# Altium PCB layout.PcbDoc (part 1 of 11)
Units mil, origin at the board's own origin, x right, y up, seen from the top; angles counter-clockwise.
Board outline 3543.31 x 3149.61 mil, 2 copper layers (Top Layer, Bottom Layer); 78 components, 73 nets, 327 pads, 143 vias.
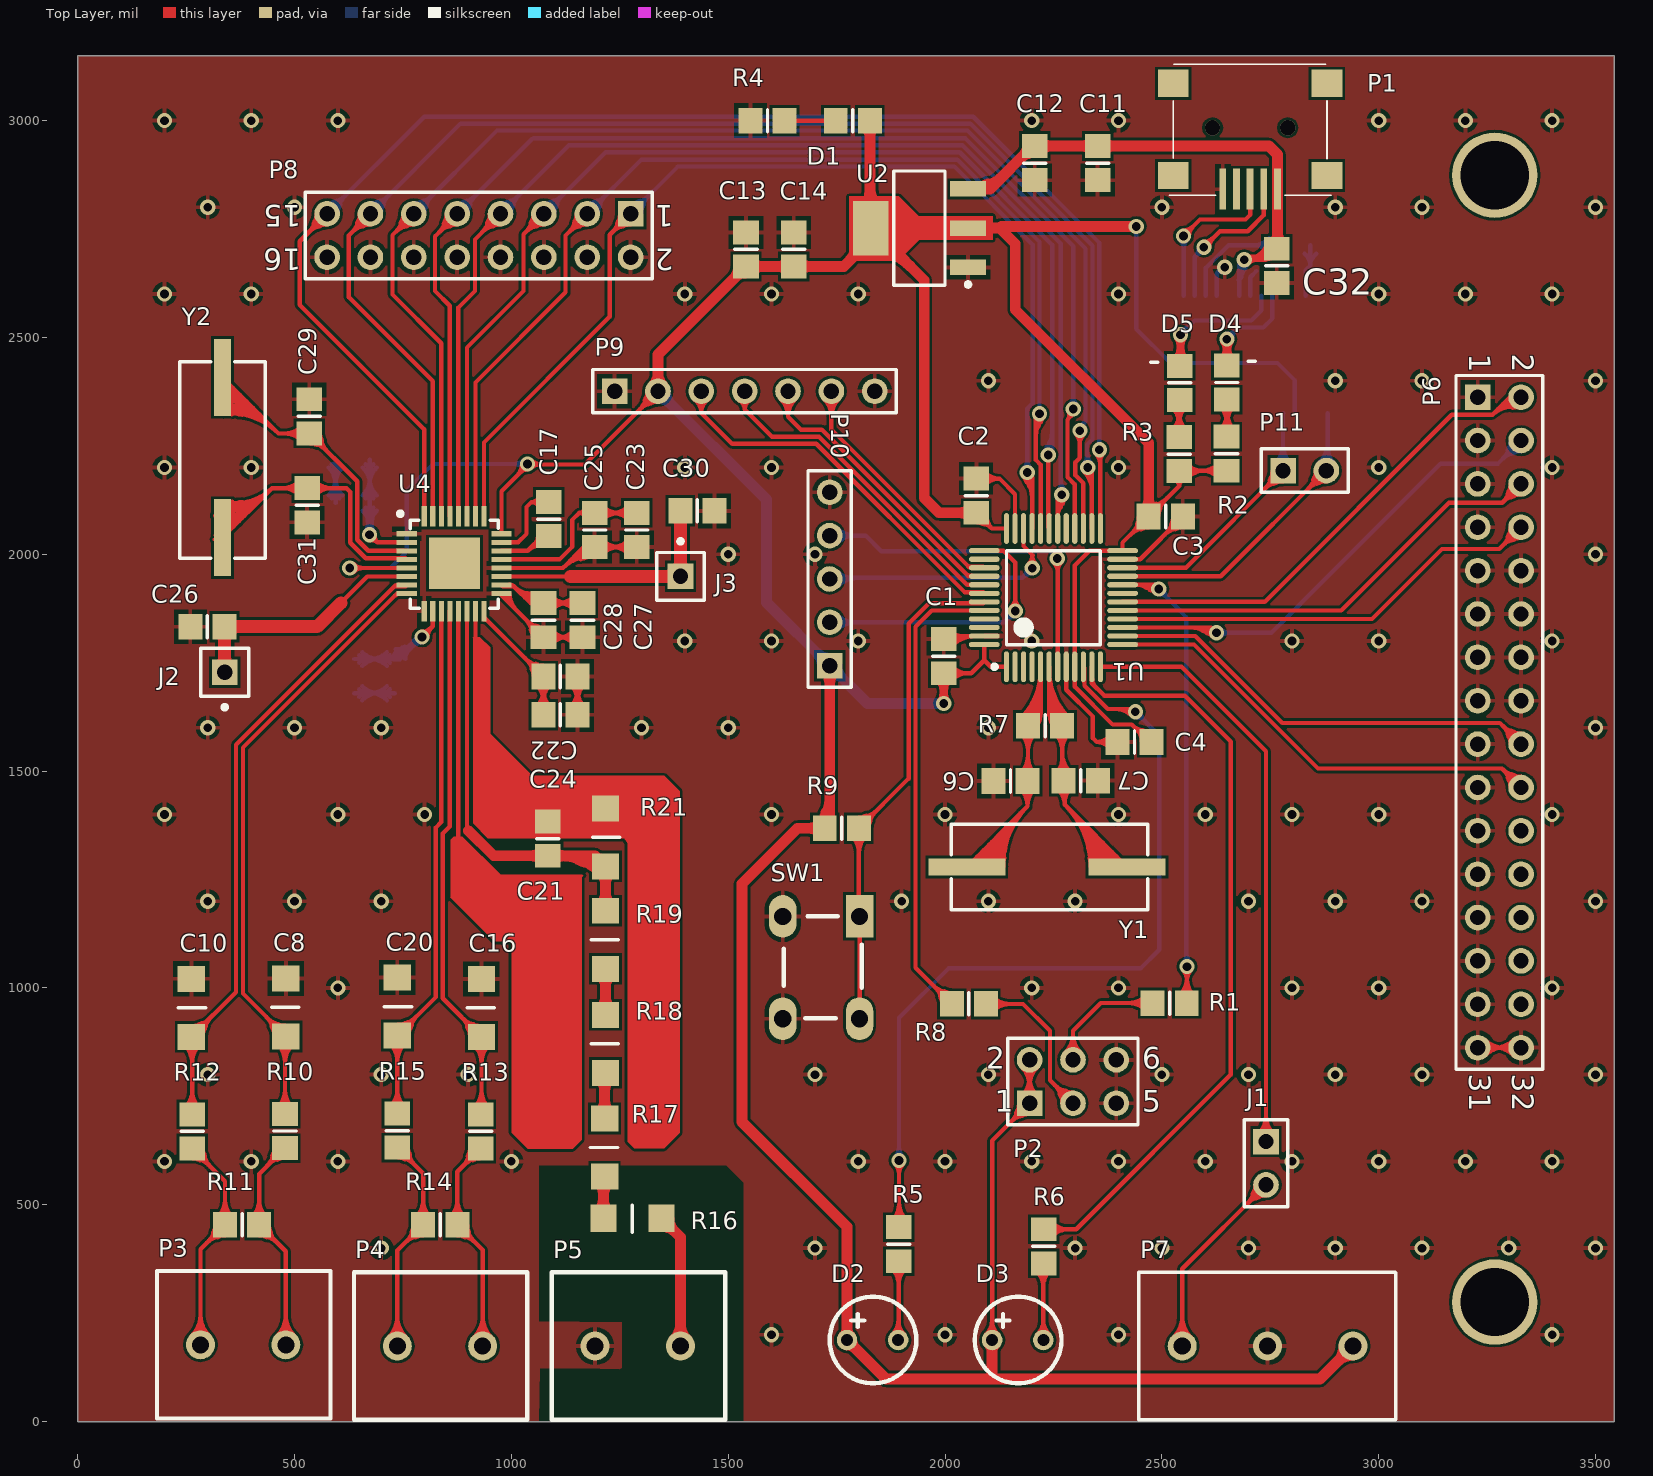
[diagram p0: Top Layer view]
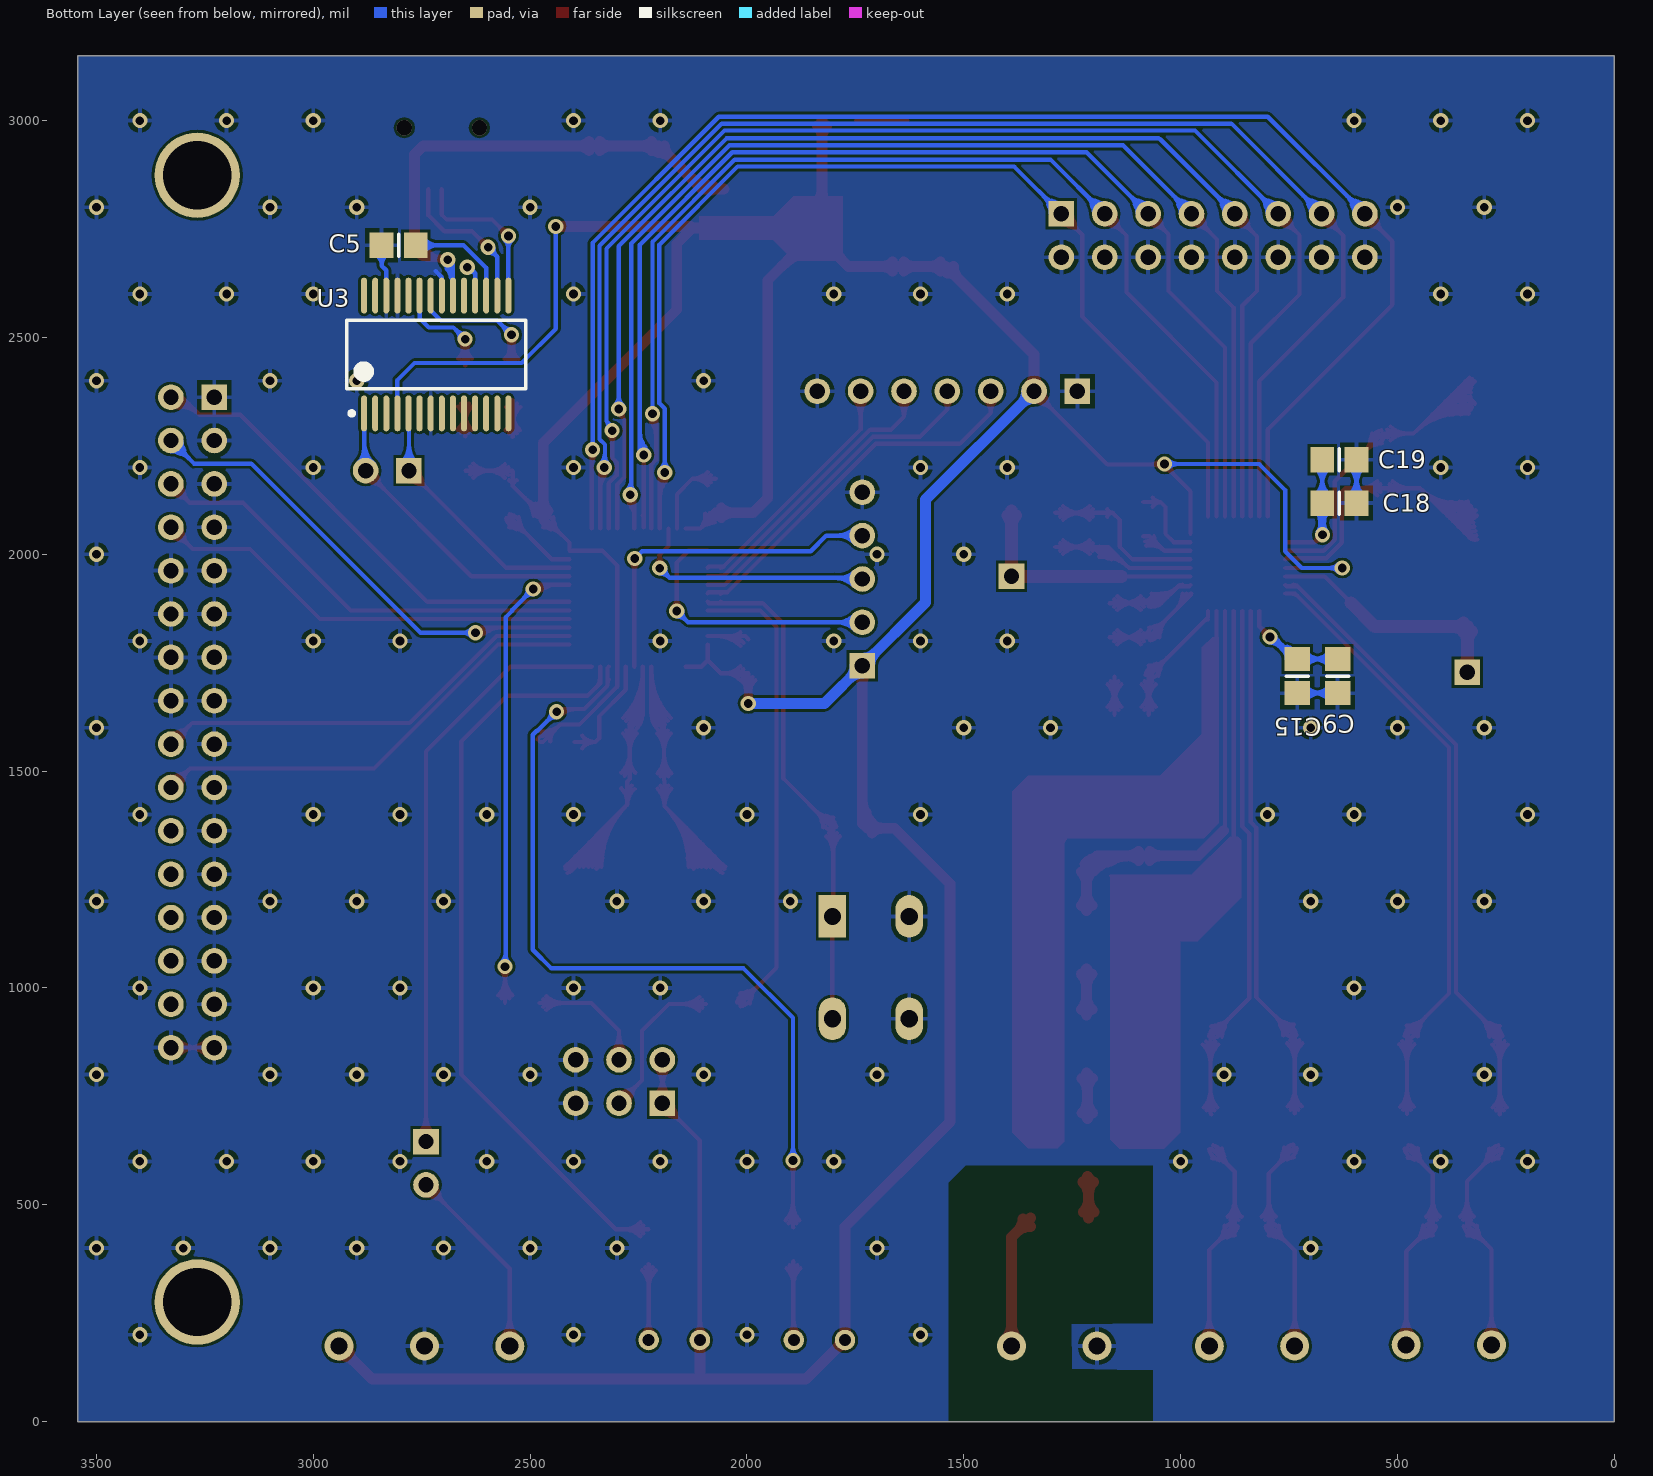
[diagram p1: Bottom Layer view, seen from below]

## Layer stack, top to bottom
Top Layer: signal copper 1.4
Dielectric: dielectric 12.6, FR-4, Dk 4.8
Bottom Layer: signal copper 1.4

## Board outline
0,0 0,3149.61 3543.31,3149.61 3543.31,0

## Design rules (kind name [scope] priority, off if disabled: settings)
Clearance [All] p1: gap=6
MinimumSolderMaskSliver [All] p1: minsoldermaskwidth=1
PolygonConnect [All] p1: connectstyle=Relief reliefconductorwidth=10 reliefentries=4 polygonreliefangle="90 Angle" airgapwidth=10
RoutingVias [All] p1: holewidth=20 width=35 viastyle="Through Hole" minholewidth=12 minwidth=20 maxholewidth=28 maxwidth=50
SilkToSilkClearance [All] p1: silktosilkclearance=0
SilkToSolderMaskClearance [IsPad] p1: minsilkscreentomaskgap=1 clearancetoexposedcopper=TRUE
SolderMaskExpansion [All] p1: expansion=4
Width [All] p1: maxlimit=50 minlimit=10 preferedwidth=10
25 further rules are at their usual default settings.

## Components (designator, comment, footprint, x,y, rotation, side; value= is the part's Value field where it differs from the comment)
C1 "Cap" 6-0805_M 1997,1765 r270 top
C2 "Cap" 6-0805_M 2072,2135 r270 top
C3 "Cap" 6-0805_M 2509,2087 r180 top
C4 "Cap" 6-0805_M 2437,1567 r0 top
C5 "Cap" 6-0805_M 2803.15,2712.6 r0 bottom
C6 "Cap" 6-0805_M 2151,1477 r180 top
C7 "Cap" 6-0805_M 2313,1478 r0 top
C8 "Cap" 1206_ROY 480,888 r90 top
C9 "Cap" 6-0805_M 638,1719 r270 bottom
C10 "Cap" 1206_ROY 262,1021 r270 top
C11 "Cap" 6-0805_M 2352,2902 r90 top
C12 "Cap" 6-0805_M 2207,2902 r90 top
C13 "Cap" 6-0805_M 1541.04,2702.89 r270 top
C14 "Cap" 6-0805_M 1651.28,2702.89 r270 top
C15 "Cap" 6-0805_M 731,1719 r270 bottom
C16 "Cap" 1206_ROY 931,887 r90 top
C17 "Cap" 6-0805_M 1086,2081 r270 top
C18 "Cap" 6-0805_M 634,2118 r180 bottom
C19 "Cap" 6-0805_M 634,2218 r180 bottom
C20 "Cap" 1206_ROY 737,1024 r270 top
C21 "Cap" 6-0805_M 1113,1630 r0 top
C22 "Cap" 6-0805_M 1113,1718 r0 top
C23 "Cap" 6-0805_M 1289,2056 r270 top
C24 "Cap" 6-0805_M 1084,1344 r90 top
C25 "Cap" 6-0805_M 1192,2056 r270 top
C26 "Cap" 6-0805_M 299,1833 r180 top
C27 "Cap" 6-0805_M 1164,1848 r270 top
C28 "Cap" 6-0805_M 1074,1848 r270 top
C29 "Cap" 6-0805_M 534,2318 r90 top
C30 "Cap" 6-0805_M 1429,2100 r0 top
C31 "Cap" 6-0805_M 529,2113 r270 top
C32 "Cap" 6-0805_M 2765,2665 r90 top
D1 "LED_TX" 6-0805_M 1787.4,3000 r180 top
D2 "LED_DIP" LED_3mm 1773.95,187.98 r0 top
D3 "LED_DIP" LED_3mm 2108.59,187.98 r0 top
D4 "LED_TX" 6-0805_M 2650,2396 r90 top
D5 "LED_RX" 6-0805_M 2541,2395 r90 top
J1 "Relay Jumper" HDR1X2 2740.16,645.67 r270 top
J2 "Socket" PIN1 339,1728 r180 top
J3 "Socket" PIN1 1390,1949 r0 top
P1 "USB" mini_USB 2527.56,3129.92 r270 top
P2 "BOOT" HDR2X3 2195,734 r0 top
P3 "IA" KF127-0.5-2 283,177 r0 top
P4 "IB" KF127-0.5-2 737,174 r0 top
P5 "VA" KF127-0.5-2 1193,174 r0 top
P6 "Header 16X2" HDR2X16 3228.35,2362.2 r270 top
P7 "Relay" KF127-0.5-3 2547,174 r0 top
P8 "9153Header" HDR2X8 1275,2785 r180 top
P9 "OLED" HDR1X7 1238,2376 r0 top
P10 "SWD" HDR1X5 1734,1743 r90 top
P11 "UART" HDR1X2 2779.53,2192.91 r0 top
R1 "Res3" 6-0805_M 2518,965 r180 top
R2 "Res3" 6-0805_M 2649,2232 r270 top
R3 "Res3" 6-0805_M 2540,2231 r270 top
R4 "Res3" 6-0805_M 1590.55,3000 r0 top
R5 "Res3" 6-0805_M 1893,409 r270 top
R6 "Res3" 6-0805_M 2228,404 r270 top
R7 "Res3" 6-0805_M 2230.68,1604.44 r180 top
R8 "Res3" 6-0805_M 2055,963 r180 top
R9 "Res3" 6-0805_M 1762,1368 r180 top
R10 "Res3" 6-0805_M 478,670 r90 top
R11 "Res3" 6-0805_M 379,454 r180 top
R12 "Res3" 6-0805_M 264,669 r90 top
R13 "Res3" 6-0805_M 929,669 r90 top
R14 "Res3" 6-0805_M 836,454 r180 top
R15 "Res3" 6-0805_M 737,671 r90 top
R16 "Res3" 1206_ROY 1346,469 r180 top
R17 "Res3" 1206_ROY 1215,565 r90 top
R18 "Res3" 1206_ROY 1217,804 r90 top
R19 "Res3" 1206_ROY 1217,1044 r90 top
R21 "Res3" 1206_ROY 1217,1414 r270 top
SW1 "SW_4Pin" SW_4 1803,1165 r270 top
U1 "STM32F103C8T6" LQFP48_N 2250,1900 r90 top
U2 "LM1117" SOT223-4L 1940.94,2751.97 r180 top
U3 "FT232RL-Reel" SSOP-28_N 2716.54,2460.63 r90 bottom
U4 "9153" LFCSP_32 758.72,2047.21 r0 top
Y1 "XTAL" XTAL_SMT 2235,1279 r180 top
Y2 "XTAL" XTAL_SMT 334,2223 r90 top

## Footprints (in the part's own frame and the unit in brackets; to place one, negate y for a bottom-side part, rotate by r counter-clockwise, add the part's x,y. Pads: shape width x height; smd on the part's side, far side on the other; paste and mask are expansions set on the pad)
6-0805_M [mm] "Chip Resistor, Body 2.0x1.2mm, IPC Low Density"
  rect 1.4x1.5 smd: 1(-1,0) 2(1,0)
  silkscreen extent 0,-0.65 0,0.65, body extent -1.07,-0.7 1.07,0.7, height 0.7
1206_ROY [mm]
  rect 1.52x1.6 smd: 1(0,0) 2(3.4,0)
  silkscreen extent 1.7,-0.76 1.7,0.84
HDR1X2 [mm] "Connector; Header; 2 Position"
  rect 1.5x1.5 hole 0.9: 1(0,0)
  round 1.5 hole 0.9: 2(2.54,0)
  silkscreen extent -1.27,-1.27 3.81,1.27
HDR1X5 [mm] "Connector; Header; 5 Position"
  rect 1.5x1.5 hole 0.9: 1(0,0)
  round 1.5 hole 0.9: 2(2.54,0) 3(5.08,0) 4(7.62,0) 5(10.16,0)
  silkscreen extent -1.27,-1.27 11.43,1.27
HDR1X7 [mm] "Connector; Header; 7 Position"
  rect 1.5x1.5 hole 0.9: 1(0,0)
  round 1.5 hole 0.9: 2(2.54,0) 3(5.08,0) 4(7.62,0) 5(10.16,0) 6(12.7,0) 7(15.24,0)
  silkscreen extent -1.27,-1.27 16.51,1.27
HDR2X3 [mm] "Connector; Header; 3x2 Position"
  rect 1.5x1.5 hole 0.9: 1(0,0)
  round 1.5 hole 0.9: 2(0,2.54) 3(2.54,0) 4(2.54,2.54) 5(5.08,0) 6(5.08,2.54)
  silkscreen extent -1.27,-1.27 6.35,3.81
HDR2X8 [mm] "Connector; Header; 8x2 Position"
  rect 1.5x1.5 hole 0.9: 1(0,0)
  round 1.5 hole 0.9: 2(0,2.54) 3(2.54,0) 4(2.54,2.54) 5(5.08,0) 6(5.08,2.54) 7(7.62,0) 8(7.62,2.54) 9(10.16,0) 10(10.16,2.54) 11(12.7,0) 12(12.7,2.54) 13(15.24,0) 14(15.24,2.54) 15(17.78,0) 16(17.78,2.54)
  silkscreen extent -1.27,-1.27 19.05,3.81
HDR2X16 [mm] "Connector; Header; 16x2 Position"
  rect 1.5x1.5 hole 0.9: 1(0,0)
  round 1.5 hole 0.9: 2(0,2.54) 3(2.54,0) 4(2.54,2.54) 5(5.08,0) 6(5.08,2.54) 7(7.62,0) 8(7.62,2.54) 9(10.16,0) 10(10.16,2.54) 11(12.7,0) 12(12.7,2.54) 13(15.24,0) 14(15.24,2.54) 15(17.78,0) 16(17.78,2.54) 17(20.32,0) 18(20.32,2.54) 19(22.86,0) 20(22.86,2.54) 21(25.4,0) 22(25.4,2.54) 23(27.94,0) 24(27.94,2.54) 25(30.48,0) 26(30.48,2.54) 27(33.02,0) 28(33.02,2.54) 29(35.56,0) 30(35.56,2.54) 31(38.1,0) 32(38.1,2.54)
  silkscreen extent -1.27,-1.27 39.37,3.81
KF127-0.5-2 [mm]
  round 1.7 hole 1: 1(0,0) 2(5,0)
  silkscreen extent -2.54,-4.32 7.62,4.32
KF127-0.5-3 [mm]
  round 1.7 hole 1: 1(0,0) 2(5,0) 3(10,0)
  silkscreen extent -2.54,-4.32 12.5,4.32
LED_3mm [mm]
  round 1.2 hole 0.7: 1(0,0) 2(3,0)
  silkscreen extent -1.02,-2.54 4.06,2.54
LFCSP_32 [mm]
  rect 1.2x0.3 smd: 1(0,0) 2(0,-0.5) 3(0,-1) 4(0,-1.5) 5(0,-2) 6(0,-2.5) 7(0,-3) 8(0,-3.5) 17(5.55,-3.5) 18(5.55,-3) 19(5.55,-2.5) 20(5.55,-2) 21(5.55,-1.5) 22(5.55,-1) 23(5.55,-0.5) 24(5.55,0)
  rect 0.3x1.2 smd: 9(1.025,-4.525) 10(1.525,-4.525) 11(2.025,-4.525) 12(2.525,-4.525) 13(3.025,-4.525) 14(3.525,-4.525) 15(4.025,-4.525) 16(4.525,-4.525) 25(4.525,1.025) 26(4.025,1.025) 27(3.525,1.025) 28(3.025,1.025) 29(2.525,1.025) 30(2.025,1.025) 31(1.525,1.025) 32(1.025,1.025)
  rect 3x3 smd: 33(2.8,-1.725)
  silkscreen extent -0.5,-4.35 5.35,1.3
LQFP48_N [mm] "Thin QFP, 48-Leads, Body 7x7mm, Pitch 0.5mm, IPC Medium Density"
  oval 1.8x0.3 smd: 1(-4.05,2.75) 2(-4.05,2.25) 3(-4.05,1.75) 4(-4.05,1.25) 5(-4.05,0.75) 6(-4.05,0.25) 7(-4.05,-0.25) 8(-4.05,-0.75) 9(-4.05,-1.25) 10(-4.05,-1.75) 11(-4.05,-2.25) 12(-4.05,-2.75) 25(4.05,-2.75) 26(4.05,-2.25) 27(4.05,-1.75) 28(4.05,-1.25) 29(4.05,-0.75) 30(4.05,-0.25) 31(4.05,0.25) 32(4.05,0.75) 33(4.05,1.25) 34(4.05,1.75) 35(4.05,2.25) 36(4.05,2.75)
  oval 0.3x1.8 smd: 13(-2.75,-4.05) 14(-2.25,-4.05) 15(-1.75,-4.05) 16(-1.25,-4.05) 17(-0.75,-4.05) 18(-0.25,-4.05) 19(0.25,-4.05) 20(0.75,-4.05) 21(1.25,-4.05) 22(1.75,-4.05) 23(2.25,-4.05) 24(2.75,-4.05) 37(2.75,4.05) 38(2.25,4.05) 39(1.75,4.05) 40(1.25,4.05) 41(0.75,4.05) 42(0.25,4.05) 43(-0.25,4.05) 44(-0.75,4.05) 45(-1.25,4.05) 46(-1.75,4.05) 47(-2.25,4.05) 48(-2.75,4.05)
  silkscreen extent -4.17,-2.75 2.75,3.57, body extent -3.5,-3.5 3.5,3.5, height 1.6
mini_USB [mm]
  rect 2.4x0.4 smd: 1(7.316,6.07) 2(7.316,5.27) 3(7.316,4.47) 4(7.316,3.67) 5(7.316,2.87)
  rect 1.6x1.8 smd: 6(6.516,-0.03) 7(6.516,8.97) 8(1.116,8.97) 9(1.116,-0.03)
  silkscreen extent 0,-0.26 7.67,9.2
PIN1 [mm] "Connector; Plug"
  rect 1.5x1.5 hole 0.9: 1(0,0)
  silkscreen extent -1.4,-1.4 1.4,2.17
SOT223-4L [mm] "SOT223, 4-Leads, Body 6.5x3.5mm, Pitch 2.3mm, Lead Span 7mm, IPC High Density"
  rect 2.1x0.9 smd: 1(-2.85,2.3) 2(-2.85,0) 3(-2.85,-2.3)
  rect 2.1x3.2 smd: 4(2.85,0)
  silkscreen extent -2.98,-3.35 1.5,3.42, body extent -1.85,-3.35 1.85,3.35, height 1.8
SSOP-28_N [mm] "SOP, 28-Leads, Body 10.2x5.3mm, Pitch 0.65mm, IPC Medium Density"
  oval 2.1x0.35 smd: 1(-3.45,4.225) 2(-3.45,3.575) 3(-3.45,2.925) 4(-3.45,2.275) 5(-3.45,1.625) 6(-3.45,0.975) 7(-3.45,0.325) 8(-3.45,-0.325) 9(-3.45,-0.975) 10(-3.45,-1.625) 11(-3.45,-2.275) 12(-3.45,-2.925) 13(-3.45,-3.575) 14(-3.45,-4.225) 15(3.45,-4.225) 16(3.45,-3.575) 17(3.45,-2.925) 18(3.45,-2.275) 19(3.45,-1.625) 20(3.45,-0.975) 21(3.45,-0.325) 22(3.45,0.325) 23(3.45,0.975) 24(3.45,1.625) 25(3.45,2.275) 26(3.45,2.925) 27(3.45,3.575) 28(3.45,4.225)
  silkscreen extent -3.57,-5.25 2,5.25, body extent -2.8,-5.25 2.8,5.25, height 2
SW_4 [mm]
  rect 2.5x1.6 hole 1: 1(0,0)
  oval 2.5x1.6 hole 1: 2(6,0) 3(0,-4.5) 4(6,-4.5)
  silkscreen extent 0,-4.44 5.97,0.13
XTAL_SMT [mm]
  rect 4.5x1 smd: 1(-4.69,0) 2(4.69,0)
  silkscreen extent -5.9,-2.5 5.6,2.5

## Part data
C1 C2 C3 C4 C5 C6 C7 C8 C9 C10 C11 C12 C13 C14 C15 C16 C17 C18 C19 C20 C21 C22 C23 C24 C25 C26 C27 C28 C29 C30 C31 C32: "Capacitor"
D1 D4 D5: library part LED0, "Typical INFRARED GaAs LED"
D2 D3: library part LED_3mm
J1 P3 P4 P5 P11: library part "Header 2", "Header, 2-Pin"
P1 P10: library part "Header 5", "Header, 5-Pin"
P2: library part "Header 3X2", "Header, 3-Pin, Dual row"
P6: "Header, 16-Pin, Dual row"
P7: library part "Header 3", "Header, 3-Pin"
P8: library part "Header 8X2", "Header, 8-Pin, Dual row"
P9: library part "Header 7", "Header, 7-Pin"
R1 R2 R3 R4 R5 R6 R7 R8 R9 R10 R11 R12 R13 R14 R15 R16 R17 R18 R19 R21: "Resistor"
U1: "STM32 ARM-based 32-bit MCU with 64 Kbytes Flash, 48-pin LQFP, Industrial Temperature"
U3: "USB UART Asynchronous Serial Data Transfer Chip, SSOP-28, Tape and Reel"
Y1 Y2: "Crystal Oscillator"

## Free pads (board coordinates)
  round 196.85 hole 157.48: GND(3267.72,275.59) GND(3267.72,2874.02)

## Via types
v1: diameter 35, hole 20, Top Layer to Bottom Layer, tented both sides, 113 vias
v2: diameter 35, hole 20, Top Layer to Bottom Layer, 28 vias
v3: diameter 35.43, hole 35.43, Top Layer to Bottom Layer, 2 vias